# Altium PCB PDM.PcbDoc (part 2 of 4)
Units mm, origin at the board's own origin, x right, y up, seen from the top; angles counter-clockwise.
Board outline 144.75 x 149.75 mm, 4 copper layers (Top Layer, GND, 3V3, Bottom Layer), stack 1.792 mm thick; 174 components, 85 nets, 467 pads, 47 vias.
Unrouted connection lines stored in the file: 147.
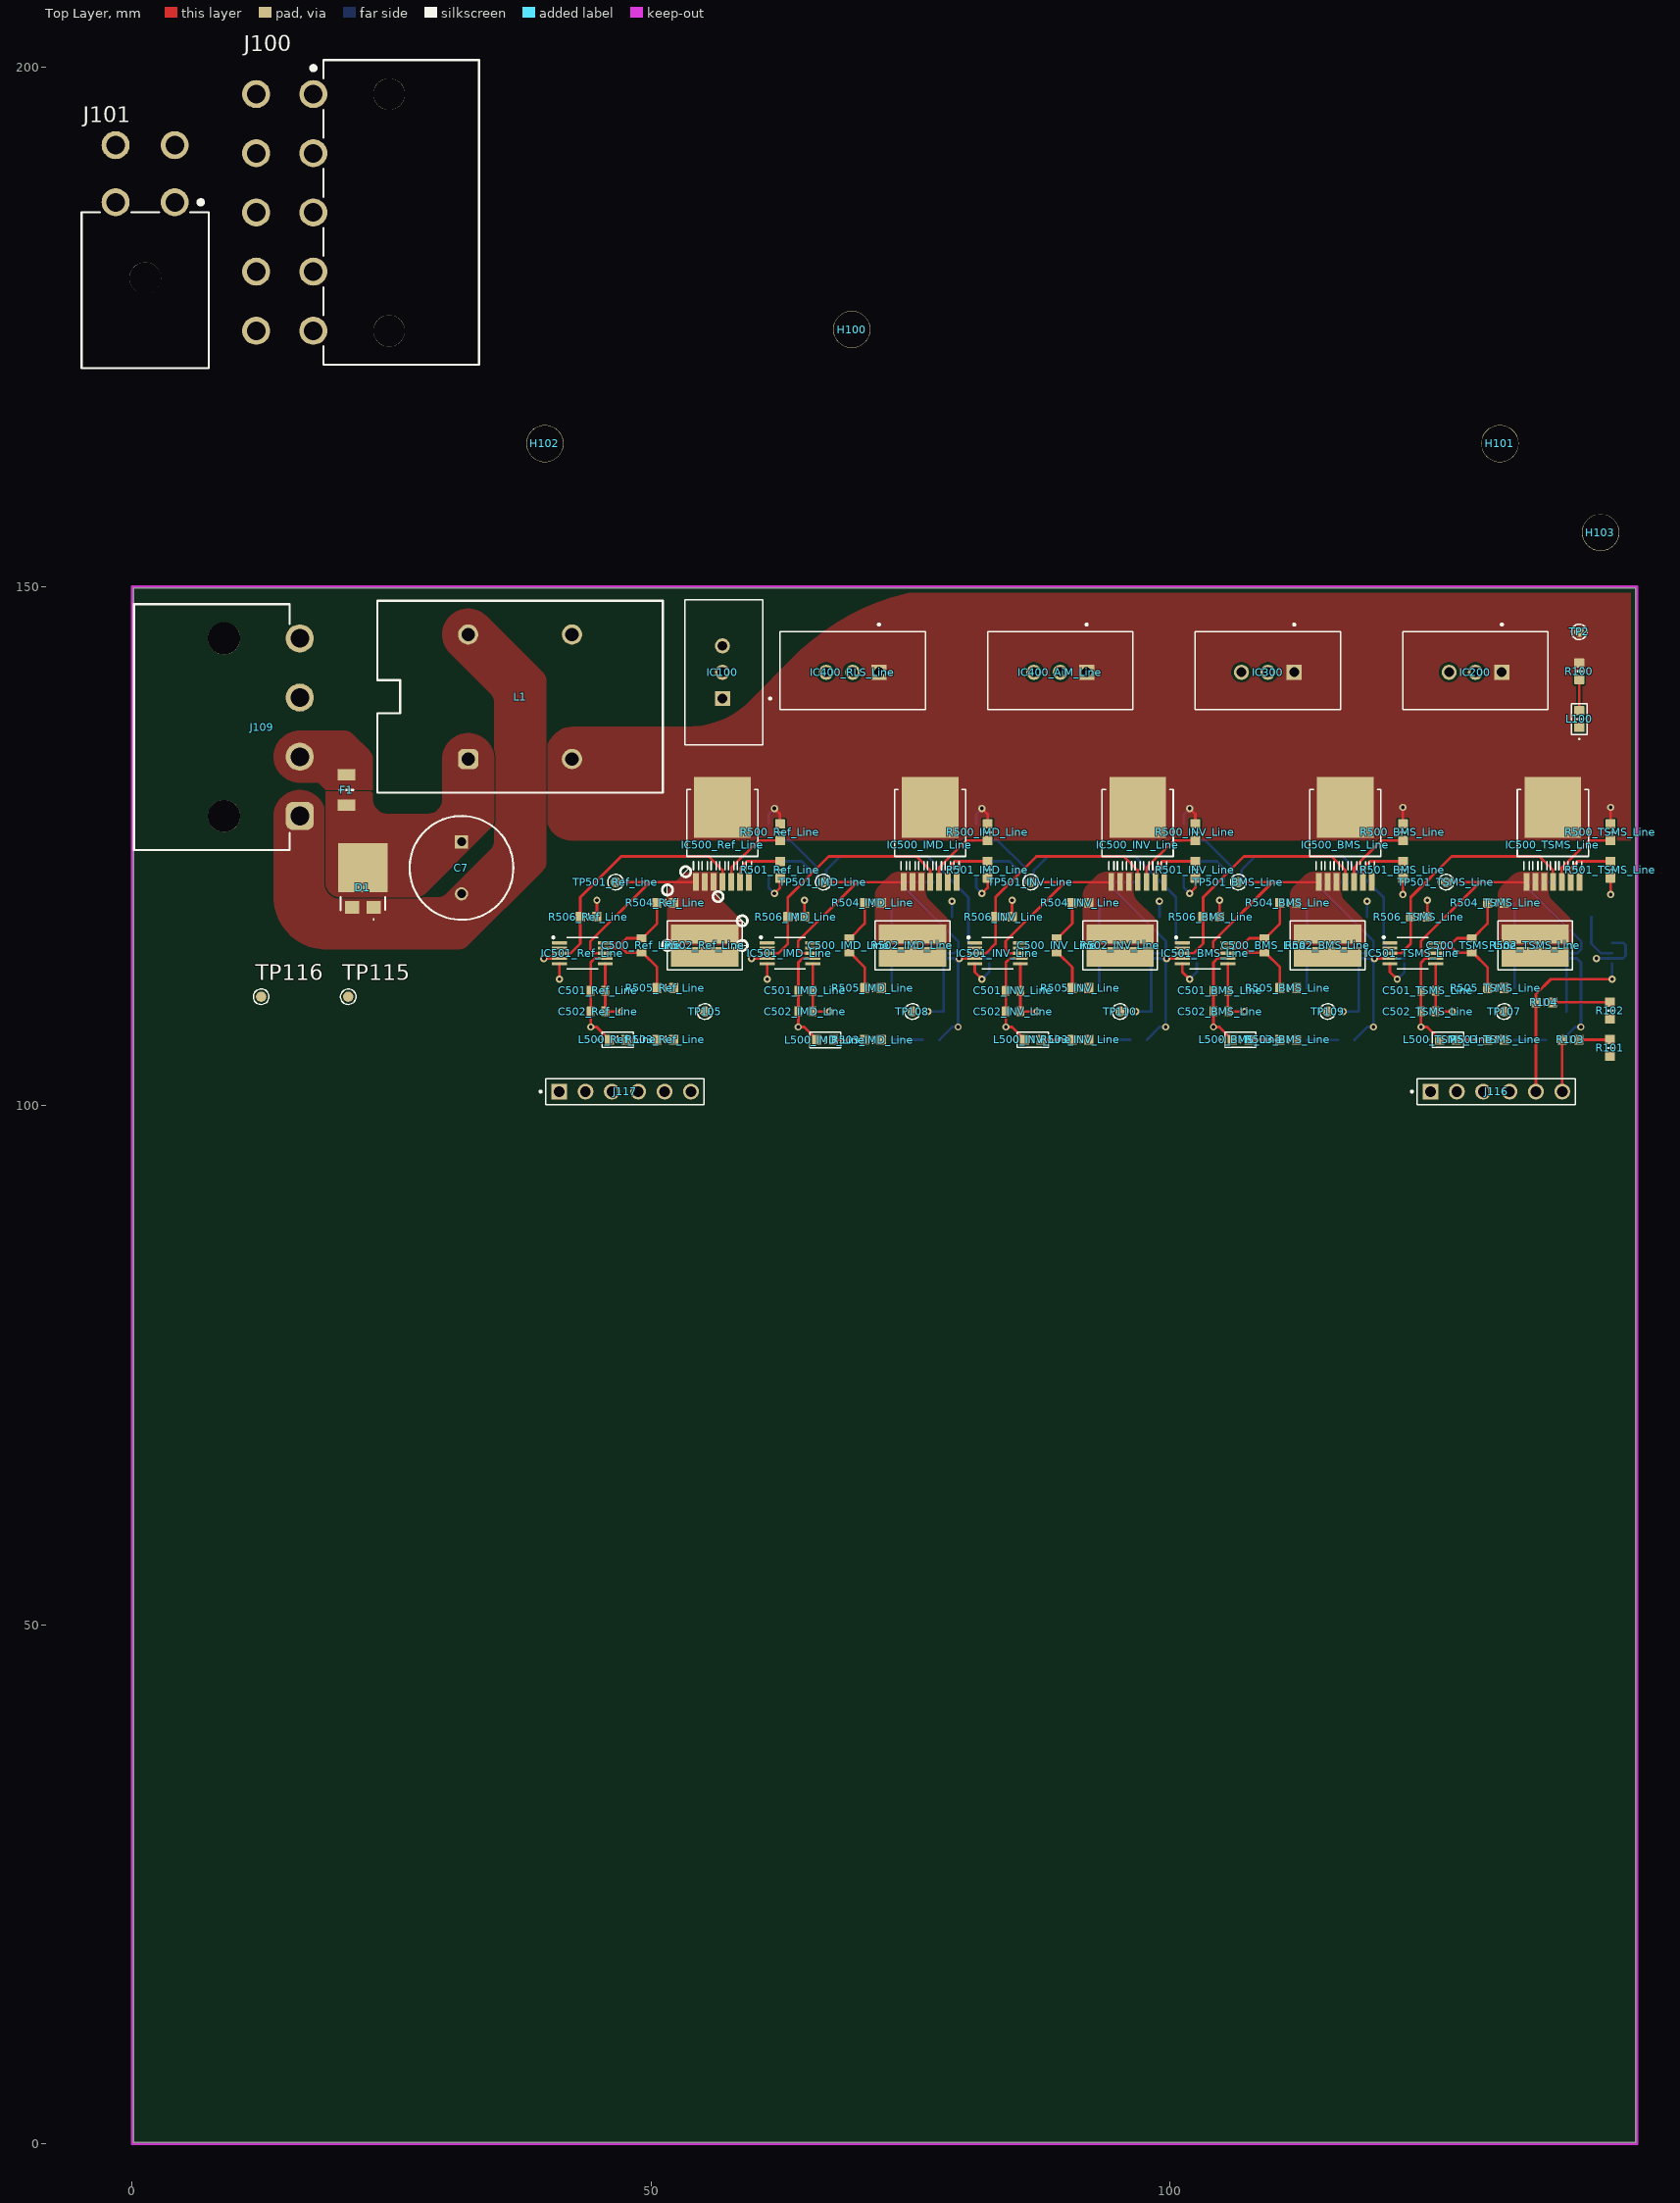
[diagram p0: Top Layer view]

## Via types
v1: diameter 0.7, hole 0.35, Top Layer to Bottom Layer, 47 vias

## Nets (pads, with @x,y where several pads share a name; then routed paths per layer and width w, separated by ;. In a path a pad name is that pad's centre, name@x,y a point inside that pad or via, vN(x,y) a via of type N, cw(c..) or ccw(c..) an arc to the next point about the centre after c; other vN are vias at no path point) (continued)
GND: C1.2 C2.2 C3.2 C4.2 C5.2 C6.2 C201.1 C202.1 C301.1 C302.1 C401_AiM_Line.1 C401_RLS_Line.1 C402_AiM_Line.1 C402_RLS_Line.1 C501_BMS_Line.1 C501_IMD_Line.1 C501_INV_Line.1 C501_Ref_Line.1 C501_TSMS_Line.1 C502_BMS_Line.1 C502_IMD_Line.1 C502_INV_Line.1 C502_Ref_Line.1 C502_TSMS_Line.1 IC100.2 IC200.2 IC201.2 IC201.7 IC300.2 IC301.7 IC302.7 IC400_AiM_Line.2 IC400_RLS_Line.2 IC401_AiM_Line.7 IC401_RLS_Line.7 IC402_AiM_Line.7 IC402_RLS_Line.7 IC500_BMS_Line.7 IC500_IMD_Line.7 IC500_INV_Line.7 IC500_Ref_Line.7 IC500_TSMS_Line.7 IC501_BMS_Line.1 IC501_BMS_Line.7 IC501_IMD_Line.1 IC501_IMD_Line.7 IC501_INV_Line.2 IC501_INV_Line.7 IC501_Ref_Line.1 IC501_Ref_Line.2 IC501_Ref_Line.7 IC501_TSMS_Line.1 IC501_TSMS_Line.7 J100.1 J100.2 J100.3 J100.4 J100.5 J101.1 J101.2 J109.3 J109.4 J116.1 J116.4 L1.3 L100.C L200.C L300.C L400_AiM_Line.C L400_RLS_Line.C L500_BMS_Line.C L500_IMD_Line.C L500_INV_Line.C L500_Ref_Line.C L500_TSMS_Line.C R300.2 R301.2 R400_AiM_Line.2 R400_RLS_Line.2 R402_AiM_Line.2 R402_RLS_Line.2 R500_BMS_Line.2 R500_IMD_Line.2 R500_INV_Line.2 R500_Ref_Line.2 R500_TSMS_Line.2 R501_BMS_Line.2 R501_IMD_Line.2 R501_INV_Line.2 R501_Ref_Line.2 R501_TSMS_Line.2 TP102.1 | length 118.1
  Top Layer w0.254: v1@44.182,107.574 v1(44.184,107.571) ; IC501_Ref_Line.7@45.585,114.176 44.58,114.176 44.184,113.78 C502_Ref_Line.1@44.184,109.071 v1(44.184,107.571) ; L500_Ref_Line.C@45.982,106.329 45.982,106.354 44.764,107.571 v1(44.184,107.571) ; v1(61.885,120.426) 62.435,120.976 R501_Ref_Line.2@62.435,121.926 ; v1(61.885,128.626) 62.435,128.076 R500_Ref_Line.2@62.435,127.126 ; v1@64.182,107.574 v1(64.184,107.571) ; IC501_IMD_Line.7@65.585,114.176 64.58,114.176 64.184,113.78 C502_IMD_Line.1@64.184,109.071 v1(64.184,107.571) ; L500_IMD_Line.C@65.982,106.329 65.982,106.354 64.765,107.571 v1(64.184,107.571) ; v1(81.885,120.426) 82.435,120.976 R501_IMD_Line.2@82.435,121.926 ; v1(81.885,128.626) 82.435,128.076 R500_IMD_Line.2@82.435,127.126 ; v1@84.182,107.574 v1(84.185,107.571) ; IC501_INV_Line.7@85.585,114.176 84.58,114.176 84.185,113.78 C502_INV_Line.1@84.185,109.071 v1(84.185,107.571) ; L500_INV_Line.C@85.982,106.329 85.982,106.354 84.765,107.571 v1(84.185,107.571) ; v1(101.885,120.426) 102.435,120.976 R501_INV_Line.2@102.435,121.926 ; v1(101.885,128.626) 102.435,128.076 R500_INV_Line.2@102.435,127.126 ; v1@104.182,107.574 v1(104.185,107.571) ; IC501_BMS_Line.7@105.585,114.176 104.58,114.176 104.185,113.78 C502_BMS_Line.1@104.185,109.071 v1(104.185,107.571) ; L500_BMS_Line.C@105.982,106.329 105.982,106.354 104.765,107.571 v1(104.185,107.571) ; v1(122.435,120.326) R501_BMS_Line.2@122.435,121.926 ; R500_BMS_Line.2@122.435,127.126 v1(122.435,128.726) ; v1@124.182,107.574 v1(124.185,107.571) ; IC501_TSMS_Line.7@125.585,114.176 124.58,114.176 124.185,113.78 C502_TSMS_Line.1@124.185,109.071 v1(124.185,107.571) ; L500_TSMS_Line.C@125.982,106.329 125.982,106.354 124.765,107.571 v1(124.185,107.571) ; v1(142.435,120.326) R501_TSMS_Line.2@142.435,121.926 ; R500_TSMS_Line.2@142.435,127.126 v1(142.435,128.726)
  Bottom Layer w0.254: R400_RLS_Line.2@61.335,121.926 61.335,120.976 v1(61.885,120.426) ; R402_RLS_Line.2@61.335,127.126 61.335,128.076 v1(61.885,128.626) ; L400_RLS_Line.C@77.785,106.326 77.785,106.351 79.002,107.569 79.582,107.569 v1(79.585,107.571) C402_RLS_Line.1@79.585,109.071 C401_RLS_Line.1@79.585,111.071 79.585,113.78 79.189,114.176 IC402_RLS_Line.7@78.185,114.176 ; R400_AiM_Line.2@81.335,121.926 81.335,120.976 v1(81.885,120.426) ; R402_AiM_Line.2@81.335,127.126 81.335,128.076 v1(81.885,128.626) ; L400_AiM_Line.C@97.787,106.329 97.787,106.354 99.005,107.571 v1(99.585,107.571) ; IC402_AiM_Line.7@98.185,114.176 99.189,114.176 99.585,113.78 C402_AiM_Line.1@99.585,109.071 v1(99.585,107.571) ; v1@99.587,107.574 v1(99.585,107.571) ; R301.2@101.335,121.926 101.335,120.976 v1(101.885,120.426) ; R300.2@101.335,127.126 101.335,128.076 v1(101.885,128.626) ; L300.C@117.787,106.329 117.787,106.354 119.005,107.571 v1(119.585,107.571) ; IC302.7@118.185,114.176 119.189,114.176 119.585,113.78 C302.1@119.585,109.071 v1(119.585,107.571) ; v1@119.587,107.574 v1(119.585,107.571) ; L200.C@137.787,106.329 137.787,106.354 139.005,107.571 v1(139.585,107.571) ; IC201.7@138.185,114.176 139.189,114.176 139.585,113.78 C202.1@139.585,109.071 v1(139.585,107.571) ; v1@139.587,107.574 v1(139.585,107.571)
IN+: F1.1 J109.2 TP115.1
IN-: C7.N D1.1 D1.2 J109.1 L1.4 TP116.1
NetC7_P: C7.P D1.3 F1.2 L1.1 TP1.1
NetC200_1: C200.1 IC201.10 R202.1 | length 7.7
  Bottom Layer w0.254: R202.1@133.185,119.526 133.185,117.531 C200.1@134.59,116.126 ; C200.1@134.685,116.126 136.121,116.126 136.571,115.676 IC201.10@138.185,115.676
NetC200_2: C200.2 IC201.9 R203.1 | length 7.7
  Bottom Layer w0.254: R203.1@133.185,111.326 133.185,113.321 C200.2@134.59,114.726 ; C200.2@134.685,114.726 136.121,114.726 136.571,115.176 IC201.9@138.185,115.176
NetC300_1: C300.1 IC302.10 R304.1 | length 7.7
  Bottom Layer w0.254: R304.1@113.185,119.526 113.185,117.531 C300.1@114.59,116.126 ; C300.1@114.685,116.126 116.121,116.126 116.571,115.676 IC302.10@118.185,115.676
NetC300_2: C300.2 IC302.9 R305.1 | length 7.7
  Bottom Layer w0.254: R305.1@113.185,111.326 113.185,113.321 C300.2@114.59,114.726 ; C300.2@114.685,114.726 116.121,114.726 116.571,115.176 IC302.9@118.185,115.176
NetC400_AiM_Line_1: C400_AiM_Line.1 IC402_AiM_Line.10 R403_AiM_Line.1 | length 7.7
  Bottom Layer w0.254: R403_AiM_Line.1@93.185,119.526 93.185,117.531 C400_AiM_Line.1@94.59,116.126 ; C400_AiM_Line.1@94.685,116.126 96.121,116.126 96.571,115.676 IC402_AiM_Line.10@98.185,115.676
NetC400_AiM_Line_2: C400_AiM_Line.2 IC402_AiM_Line.9 R404_AiM_Line.1 | length 7.7
  Bottom Layer w0.254: R404_AiM_Line.1@93.185,111.326 93.185,113.321 C400_AiM_Line.2@94.59,114.726 ; C400_AiM_Line.2@94.685,114.726 96.121,114.726 96.571,115.176 IC402_AiM_Line.9@98.185,115.176
NetC400_RLS_Line_1: C400_RLS_Line.1 IC402_RLS_Line.10 R403_RLS_Line.1 | length 7.8
  Bottom Layer w0.254: R403_RLS_Line.1@73.185,119.526 73.185,117.531 74.59,116.126 C400_RLS_Line.1@74.685,116.126 76.121,116.126 76.571,115.676 IC402_RLS_Line.10@78.185,115.676